# Altium PCB PCB1.PcbDoc
Units mil, origin at the board's own origin, x right, y up, seen from the top; angles counter-clockwise.
Board outline 5000 x 2700 mil, 2 copper layers (Top Layer, Bottom Layer); 49 components, 33 nets, 146 pads, 0 vias.
Unrouted connection lines stored in the file: 91.
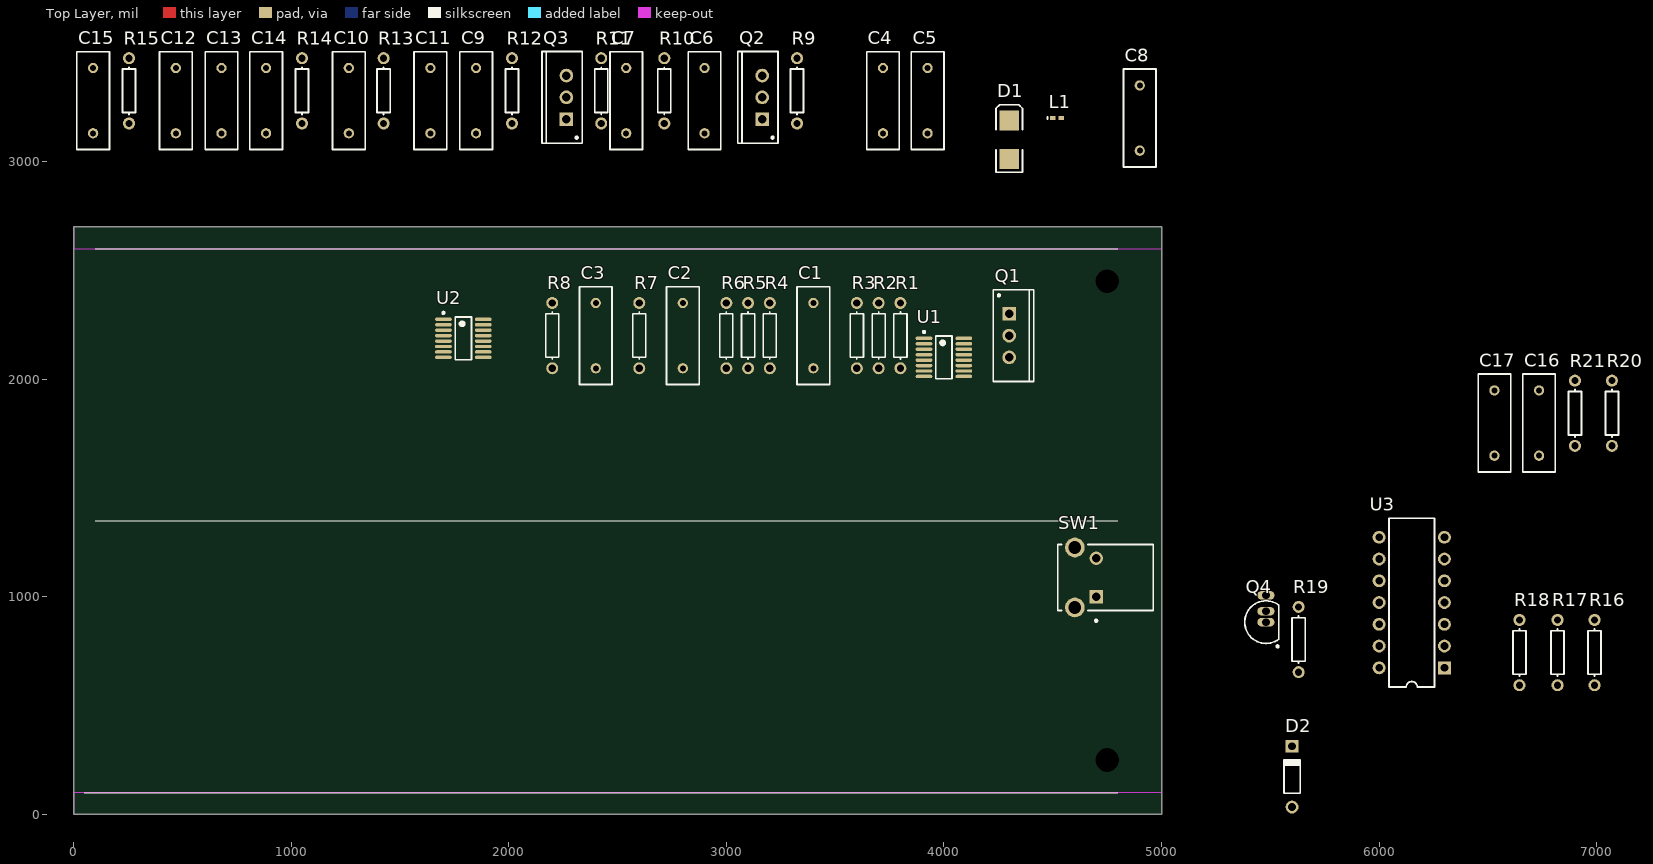
[diagram p0: Top Layer view]
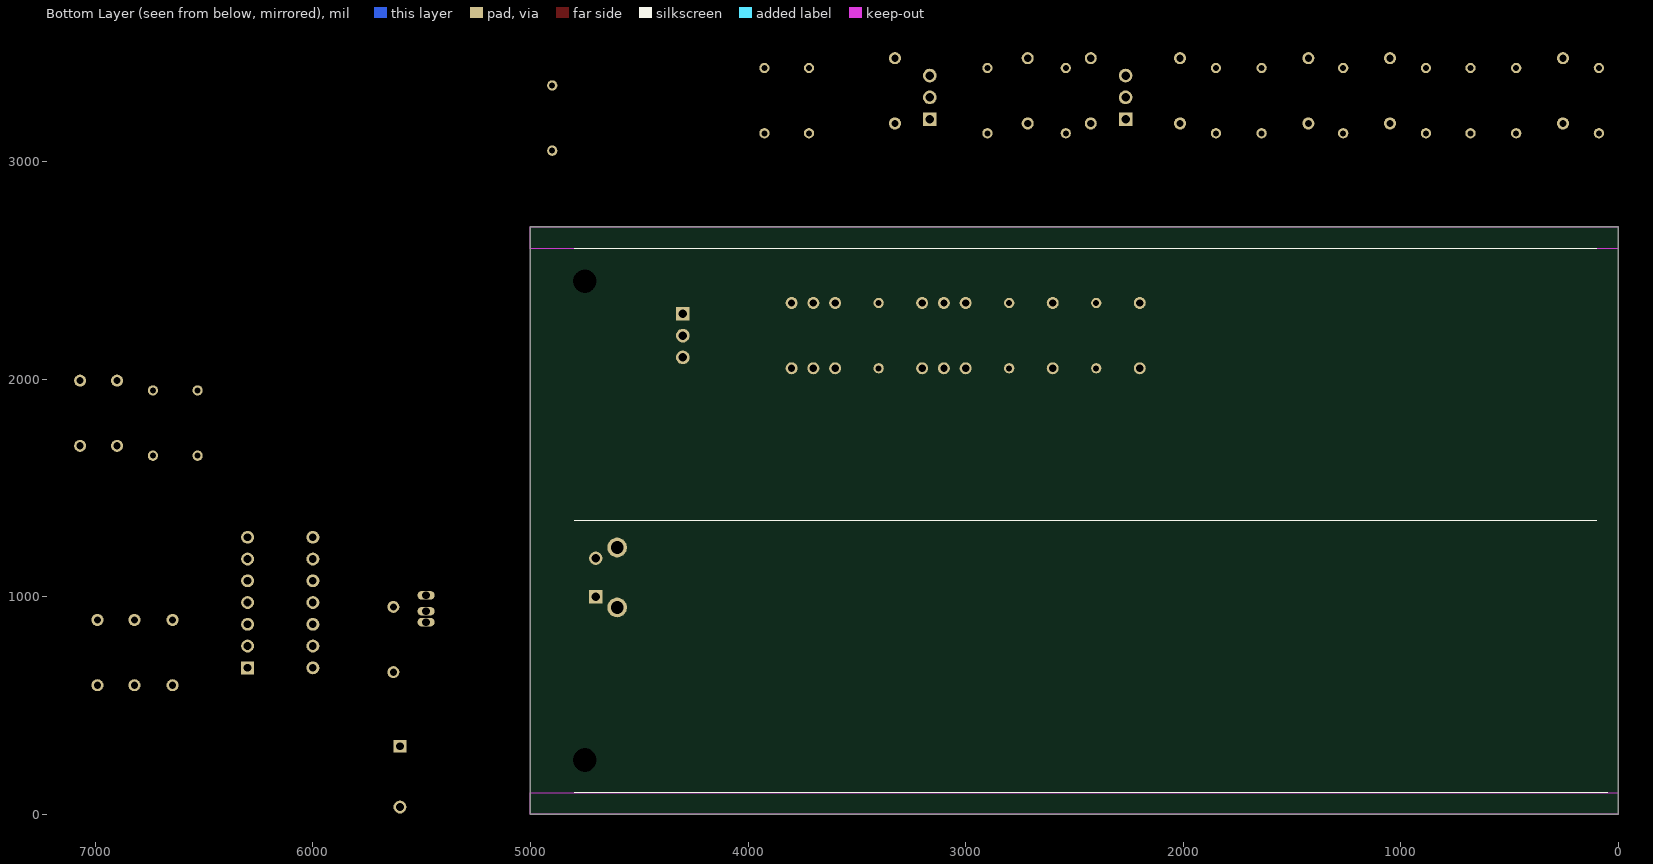
[diagram p1: Bottom Layer view, seen from below]

## Layer stack, top to bottom
Top Solder: solder mask 0.4, Solder Resist, Dk 3.5
Top Layer: signal copper 1.4
Dielectric 1: dielectric 12.6, FR-4, Dk 4.8
Bottom Layer: signal copper 1.4
Bottom Solder: solder mask 0.4, Solder Resist, Dk 3.5

## Board outline
0,0 0,2700 5000,2700 5000,0

## Design rules (kind name [scope] priority, off if disabled: settings)
Clearance [All] p1: gap=10 ignorepadtopadclearanceinfootprint=FALSE except(0: Arc-Hole Track-Hole SMDPad-Hole THPad-Hole Via-Hole Fill-Hole Poly-Hole Region-Hole Text-Hole)
PolygonConnect [All] p1: connectstyle=Relief reliefconductorwidth=10 reliefentries=4 polygonreliefangle="90 Angle" airgapwidth=10
RoutingVias [All] p1: holewidth=28 width=50 viastyle="Through Hole" minholewidth=28 minwidth=50 maxholewidth=28 maxwidth=50
SolderMaskExpansion [All] p1: expansion=4 istentingtop=FALSE
Width [All] p1: maxlimit=10 minlimit=10 preferedwidth=10
30 further rules are at their usual default settings.

## Classes and differential pairs
component class Sheet3: C16 C17 D2 Q4 R16 R17 R18 R19 R20 R21 SW1 U3
component class Sheet2: C4 C5 C6 C7 C8 C9 C10 C11 C12 C13 C14 C15 D1 L1 Q2 Q3 R9 R10 R11 R12 R13 R14 R15 U2
component class Sheet1: C1 C2 C3 Q1 R1 R2 R3 R4 R5 R6 R7 R8 U1

## Components (designator, comment, footprint, x,y, rotation, side; value= is the part's Value field where it differs from the comment)
C1 "Cap" RAD-0.3 3400,2200 r90 top value=?
C2 "Cap" RAD-0.3 2800,2200 r90 top value=?
C3 "Cap" RAD-0.3 2400,2200 r90 top value=?
C4 "Cap" RAD-0.3 3720,3280 r90 top value=?
C5 "Cap" RAD-0.3 3925,3280 r90 top value=?
C6 "Cap" RAD-0.3 2900,3280 r90 top value=?
C7 "Cap" RAD-0.3 2540,3280 r90 top value=?
C8 "Cap" RAD-0.3 4900,3200 r90 top value=?
C9 "Cap" RAD-0.3 1850,3280 r90 top value=?
C10 "Cap" RAD-0.3 1265,3280 r90 top value=?
C11 "Cap" RAD-0.3 1640,3280 r90 top value=?
C12 "Cap" RAD-0.3 470,3280 r90 top value=?
C13 "Cap" RAD-0.3 680,3280 r90 top value=?
C14 "Cap" RAD-0.3 885,3280 r90 top value=?
C15 "Cap" RAD-0.3 90,3280 r90 top value=?
C16 "Cap" RAD-0.3 6735,1798.29 r90 top value=1uF
C17 "Cap" RAD-0.3 6530,1798.29 r90 top value=10uF
D1 "D Schottky" SMB 4300,3100 r90 top
D2 "Diode 1N4148" DO-35 5600,173.29 r90 top
L1 "Inductor" 0402-A 4519.69,3200 r0 top value=3.3uH
Q1 "NMOS-2" TO-220AB 4300,2200 r270 top
Q2 "NMOS-2" TO-220AB 3165,3295 r90 top
Q3 "NMOS-2" TO-220AB 2265,3295 r90 top
Q4 "2N3904" TO-92A 5480,883.29 r0 top
R1 "Res1" AXIAL-0.3 3800,2200 r90 top value=0.010m
R2 "Res1" AXIAL-0.3 3700,2200 r90 top value=10
R3 "Res1" AXIAL-0.3 3600,2200 r90 top value=?
R4 "Res1" AXIAL-0.3 3200,2200 r270 top value=?
R5 "Res1" AXIAL-0.3 3100,2200 r90 top value=?
R6 "Res1" AXIAL-0.3 3000,2200 r90 top value=?
R7 "Res1" AXIAL-0.3 2600,2200 r90 top value=?
R8 "Res1" AXIAL-0.3 2200,2200 r90 top value=?
R9 "Res1" AXIAL-0.3 3325,3325 r90 top value=10
R10 "Res1" AXIAL-0.3 2715,3325 r90 top value=7.5m
R11 "Res1" AXIAL-0.3 2425,3325 r90 top value=10
R12 "Res1" AXIAL-0.3 2015,3325 r90 top value=?
R13 "Res1" AXIAL-0.3 1425,3325 r90 top value=?
R14 "Res1" AXIAL-0.3 1050,3325 r90 top value=?
R15 "Res1" AXIAL-0.3 255,3325 r90 top value=?
R16 "Res1" AXIAL-0.3 6990,743.29 r90 top value=330
R17 "Res1" AXIAL-0.3 6820,743.29 r90 top value=10
R18 "Res1" AXIAL-0.3 6645,743.29 r90 top value=100k
R19 "Res1" AXIAL-0.3 5630,803.29 r90 top value=1k
R20 "Res1" AXIAL-0.3 7070,1843.29 r90 top value=10
R21 "Res1" AXIAL-0.3 6900,1843.29 r90 top value=10k
SW1 "B3F-3152" FP-B3F-3152-MFG 4742.32,1088.58 r90 top
U1 "LT4256-3IGN#PBF" LT-GN-16_L 4000,2100 r0 top
U2 "LTC3851AEGN#PBF" LT-GN-16_L 1791.54,2187.5 r0 top
U3 "SN74LS14N" N014 6150,973.29 r90 top

## Footprints (in the part's own frame and the unit in brackets; to place one, negate y for a bottom-side part, rotate by r counter-clockwise, add the part's x,y. Pads: shape width x height; smd on the part's side, far side on the other; paste and mask are expansions set on the pad)
0402-A [mm] "Chip Inductor, Body 1.0x0.5mm, IPC High Density"
  rect 0.6x0.5 smd: 1(-0.5,0) 2(0.5,0)
  silkscreen extent -1.1,-0.15 -1.1,0.15, body extent -0.55,-0.3 0.55,0.3, height 0.55
AXIAL-0.3 [mm] "Axial Device, Thru-Hole; 2 Leads; 0.3 in Pin Spacing"
  round 1.4 hole 0.85: 1(-3.81,0) 2(3.81,0)
  silkscreen extent -2.77,-0.76 2.77,0.76
DO-35 [mm] "Diode, Axial; Body 3.8 x 1.9 mm (LxDia. max), Lead Dia. 0.53 mm (max)"
  round 1.5 hole 0.9: 1(-3.55,0)
  rect 1.5x1.5 hole 0.9: 2(3.55,0)
  silkscreen extent -1.95,-0.95 2.05,0.95
FP-B3F-3152-MFG [mm]
  rect 1.55x1.55 hole 1 paste-1000 mask+0: 1(-2.25,1.075)
  round 1.55 hole 1 paste-1000 mask+0: 2(2.25,1.075)
  round 2.3 hole 1.5 paste-1000 mask+0: 3(-3.5,3.575) 4(3.5,3.575)
  silkscreen extent -5.17,-5.58 3.85,5.58, body extent -4.75,-5.68 4.75,5.68, height 0.25
LT-GN-16_L [mm] "SOP, 16-Leads, Body 5x4mm, Pitch 0.635mm, IPC High Density"
  oval 1.95x0.4 smd: 1(-2.325,2.222) 2(-2.325,1.587) 3(-2.325,0.953) 4(-2.325,0.318) 5(-2.325,-0.318) 6(-2.325,-0.953) 7(-2.325,-1.587) 8(-2.325,-2.222) 9(2.325,-2.222) 10(2.325,-1.587) 11(2.325,-0.953) 12(2.325,-0.318) 13(2.325,0.318) 14(2.325,0.953) 15(2.325,1.587) 16(2.325,2.222)
  silkscreen extent -2.45,-2.5 0.95,3.1, body extent -2,-2.5 2,2.5, height 1.75
N014 [mm] "DIP; 14 Leads; Row Spacing 7.62 mm; Pitch 2.54 mm"
  rect 1.5x1.5 hole 0.9: 1(-7.62,-3.81)
  round 1.5 hole 0.9: 2(-5.08,-3.81) 3(-2.54,-3.81) 4(0,-3.81) 5(2.54,-3.81) 6(5.08,-3.81) 7(7.62,-3.81) 8(7.62,3.81) 9(5.08,3.81) 10(2.54,3.81) 11(0,3.81) 12(-2.54,3.81) 13(-5.08,3.81) 14(-7.62,3.81)
  silkscreen extent -9.85,-2.65 9.85,2.65, body extent -9.15,-5.08 9.15,5.12, height 7.88
RAD-0.3 [mm] "Radial Cap, Thru-Hole; 2 Leads; 0.3 in Pin Spacing"
  round 1.2 hole 0.7: 1(-3.81,0) 2(3.81,0)
  silkscreen extent -5.71,-1.91 5.71,1.91
SMB [mm] "DO-214-AA/SMB; 2 C-Bend Leads; Body 5.3 x 3.6 mm, inc. leads (LxW)"
  rect 2.3x2.3 smd: 1(-2.25,0) 2(2.25,0)
  silkscreen extent -3.8,-1.55 4.1,1.55
TO-92A [mm] "TO, Flat Index; 3 In-Line, Axial Leads; Body Dia. 4.5mm; Leads 0.51 x 0.48 mm (max)"
  oval 2x1 hole 0.9: 1(0,3.132) 2(0,0) 3(0,1.27)
  silkscreen extent -2.48,-2.95 1.5,2.48, body extent -2.48,-2.5 1.5,2.5, height 6.86
TO-220AB [mm] "TO, Thru-Hole, Vertical, Heatsink Mounted; 3 In-Line Leads; Pitch 2.54 mm"
  rect 1.6x1.6 hole 1: 1(-2.54,0)
  round 1.6 hole 1: 2(0,0) 3(2.54,0)
  silkscreen extent -5.35,-1.85 5.35,2.85, body extent -5.4,-1.9 5.4,2.9, height 19.3

## Part data
C1 C2 C3 C4 C5 C6 C7 C8 C9 C10 C11 C12 C13 C14 C15 C16 C17: "Capacitor", LatestRevisionDate=17-Jul-2002, LatestRevisionNote="Re-released for DXP Platform.", PackageDescription="Radial Cap, Thru-Hole; 2 Leads; 0.3 in Pin Spacing", PackageReference=RAD-0.3, Published=8-Jun-2000, Publisher="Altium Limited"
D1: "Schottky Diode", Code_JEDEC=DO-214-AA, LatestRevisionDate=17-Jul-2002, LatestRevisionNote="Re-released for DXP Platform.", PackageDescription="DO-214-AA/SMB; 2 C-Bend Leads; Body 5.3 x 3.6 mm, inc. leads (LxW)", PackageReference=SMB, Published=8-Jun-2000, Publisher="Altium Limited"
D2: "High Conductance Fast Diode", Code_JEDEC=DO-204-AH, ComponentLink1Description="Manufacturer Link", ComponentLink1URL=http://www.fairchildsemi.com/, ComponentLink2Description=Datasheet, ComponentLink2URL=http://www.fairchildsemi.com/ds/1N%2F1N4148.pdf, DatasheetVersion=1997, LatestRevisionDate=17-Jul-2002, LatestRevisionNote="Re-released for DXP Platform.", PackageDescription="Diode, Axial; Body 3.8 x 1.9 mm (LxDia. max), Lead Dia. 0.53 mm (max)", PackageReference=DO-35, Published=8-Jun-2000, Publisher="Altium Limited"
Q1 Q2 Q3: "N-Channel Power MOSFET", ComponentLink1Description="Manufacturer Link", ComponentLink1URL=http://www.irf.com/, DatasheetVersion=PD-9.814, LatestRevisionDate=17-Jul-2002, LatestRevisionNote="Re-released for DXP Platform.", Note="Pin 2 is electrically connected to pin 4.", PackageDescription="TO, Thru-Hole, Vertical, Heatsink Mounted; 3 In-Line Leads; Pitch 2.54 mm", PackageReference=TO-220AB, PackageVersion=Feb-1997, Published=8-Jun-2000, Publisher="Altium Limited"
Q4: "NPN General Purpose Amplifier", ComponentLink1Description="Manufacturer Link", ComponentLink1URL=http://www.fairchildsemi.com/, ComponentLink2Description=Datasheet, ComponentLink2URL=http://www.fairchildsemi.com/ds/2N%2F2N3904.pdf, DatasheetVersion=1997, LatestRevisionDate=15-Jan-2003, LatestRevisionNote="PCB Footprint 'BCY-W3/D4.7' replaced", PackageDescription="TO, Flat Index; 3 In-Line, Axial Leads; Body Dia. 4.5mm; Leads 0.51 x 0.48 mm (max)", PackageReference=TO-92A, PackageVersion=Sep-1998, Published=8-Jun-2000, Publisher="Altium Limited"
R1 R2 R3 R4 R5 R6 R7 R8 R9 R10 R11 R12 R13 R14 R15 R16 R17 R18 R19 R20 R21: "Resistor", LatestRevisionDate=17-Jul-2002, LatestRevisionNote="Re-released for DXP Platform.", PackageDescription="Axial Device, Thru-Hole; 2 Leads; 0.3 in Pin Spacing", PackageReference=AXIAL-0.3, Published=8-Jun-2000, Publisher="Altium Limited"
SW1: library part CMP-08834-000033-1, "SWITCH TACTILE SPST-NO 0.05A 24V", Actuator Color=Yellow, Contact Current Rating=50mA, Contact Resistance=100mR, Max Operating Temperature=70°C, Max Voltage Rating (DC)=24V, Min Operating Temperature=-25°C, Operating Force=1.47N, Package Quantity=1000, Ratings=IP00, Actuator Type=PLUNGER, Contact Material=Gold, Contact Plating=Gold, Contact Type="1 maker", Current Rating=50mA, Depth=7.15mm, Electrical Life=300000Cycles, Height=6.15mm, Illumination Type=Non-Illuminated, Lead Free="Lead Free", Length=7.3mm, Max Current Rating=50mA, Mechanical Life=300000Cycles, Mount="Through Hole", Number of Pins=4, Number of Poles=1, Orientation="Right Angle", Packaging=Bulk, Radiation Hardening=No, RoHS Compliant=Yes, Series=B3F, Switch Function=Off-Mom, Switch Travel=0.25mm, Termination="PC Pins", Throw Configuration=SPST, Voltage Rating (DC)=24V, Weight=0.25g, Width=6mm
U1: library part CMP-0474-00283-1, "Positive High Voltage Hot Swap Controller with Open-Circuit Detect, 10.8 to 80 V Vin, 16-pin SOP (GN-16), -40 to 85 degC, Pb-Free", Extended Temp="C, I", In-Rush Current=Active, Manufacturer="Linear Technology", Power Good=yes, Active Limiting=yes, Circuit Breaker Accuracy(%)=18, Circuit Breaker Threshold="55 mV", Circuit Breakers(#)=1, ComponentLink1Description="Manufacturer URL", ComponentLink1URL=http://www.linear.com/, ComponentLink2Description=Datasheet, ComponentLink2URL=http://cds.linear.com/docs/en/datasheet/42563fa.pm6.pdf, ComponentLink3Description="Package Specification", ComponentLink3URL=http://cds.linear.com/docs/en/packaging/05081641_B_GN16.pdf, DatasheetVersion="Rev. A", Fast Comparator=no, Fault=no, Foldback=yes, Mounting Technology="Surface Mount", PackageDescription="16-Pin Plastic SSOP, Body 4.9 x 3.9 mm, Pitch 0.635 mm", PackageReference=GN-16, PackageVersion="Rev. B, 03/2012", PartNumber=LT4256-3IGN#PBF, Reset=no, RoHS=TRUE, Vin Range="10.8 to 80 V"
U2: library part CMP-0492-01020-1, "Synchronous Step-Down Switching Regulator Controller (with Improved PLL), 16-pin SOP (GN-16), -40 to 125 degC, Pb-Free", Frequency Sync Range="250kHz - 750kHz", Manufacturer="Linear Technology", ComponentLink1Description="Manufacturer URL", ComponentLink1URL=http://www.linear.com/, ComponentLink2Description=Datasheet, ComponentLink2URL=http://cds.linear.com/docs/en/datasheet/3851afa.pdf, ComponentLink3Description="Package Specification", ComponentLink3URL=http://cds.linear.com/docs/en/packaging/05081641_B_GN16.pdf, DatasheetVersion="Rev. A", Mounting Technology="Surface Mount", Number of Outputs=1, PackageDescription="16-Pin Plastic SSOP, Body 4.9 x 3.9 mm, Pitch 0.635 mm", PackageReference=GN-16, PackageVersion="Rev. B, 03/2012", PartNumber=LTC3851AEGN#PBF, RoHS=TRUE
U3: "Hex Schmitt-Trigger Inverter", ComponentLink1Description="Manufacturer Link", ComponentLink1URL=http://www.ti.com/, ComponentLink2Description=Datasheet, ComponentLink2URL=http://www-s.ti.com/sc/ds/sn74ls14.pdf, DatasheetVersion=Mar-1988, LatestRevisionDate=04-Mar-2005, LatestRevisionNote="Stylized 3D Model Added.", PackageDescription="DIP; 14 Leads; Row Spacing 7.62 mm; Pitch 2.54 mm", PackageReference=N014, PackageVersion=Oct-1995, Published=8-Jun-2000, Publisher="Altium Limited"
L1: Code_IEC=1005, Code_JEITA=0402, LatestRevisionDate=29-May-2009, LatestRevisionNote="IPC-7351 Footprint Added.", PackageDescription="Chip Inductor", PackageReference=0402-A, Published=8-Jun-2000, Publisher="Altium Limited"

## Free pads (board coordinates)
  round 0 hole 109: ""(4750,250) ""(4750,2450)

## Nets (pads, with @x,y where several pads share a name; then routed paths per layer and width w, separated by ;. In a path a pad name is that pad's centre, name@x,y a point inside that pad or via, vN(x,y) a via of type N, cw(c..) or ccw(c..) an arc to the next point about the centre after c; other vN are vias at no path point)
GND: C1.1 C2.1 C3.1 C4.1 C5.1 C7.1 C8.1 C9.1 C10.1 C11.1 C12.1 C13.1 C15.1 C16.1 C17.1 Q3.3 Q4.1 R7.1 R8.1 R13.1 R15.1 R21.2 SW1.1 U1.8 U2.10 U3.7
INTVCC: C12.2 D1.1 U2.12
MR#: R20.2 SW1.2
NetC1_2: C1.2 R4.1
NetC2_2: C2.2 R3.1 R6.2 U1.1
NetC3_2: C3.2 U1.9
NetC4_2: C4.2 C5.2 Q2.2 U2.13
NetC6_1: C6.1 L1.1 Q2.3 Q3.2 U2.16
NetC6_2: C6.2 D1.2 U2.14
NetC9_2: C9.2 R12.2 U2.5
NetC10_2: C10.2 U2.4
NetC11_2: C11.2 R13.2 U2.2
NetC13_2: C13.2 R12.1
NetC14_1: C14.1 C15.2 R14.1 R15.2 U2.6
NetC16_2: C16.2 Q4.2 R19.1 R21.1
NetC17_2: C17.2 D2.1 R18.1 R20.1 U3.1
NetL1_2: L1.2 R10.2 U2.8
NetQ1_1: Q1.1 R2.2
NetQ1_2: Q1.2 R1.2 U1.15
NetQ1_3: Q1.3 R5.2 U1.12
NetQ2_1: Q2.1 R9.1
NetQ3_1: Q3.1 R11.1
NetQ4_3: Q4.3 R16.2 R17.2
NetR1_1: R1.1 R3.2 U1.16
NetR2_1: R2.1 R4.2 U1.13
NetR5_1: R5.1 R7.2 U1.10
NetR6_1: R6.1 R8.2 U1.2
NetR9_2: R9.2 U2.15
NetR11_2: R11.2 U2.11
NetR19_2: R19.2 U3.4
NetU3_2: U3.2 U3.3
RST: R17.1
VCC: C7.2 C8.2 C14.2 D2.2 R10.1 R14.2 R16.1 R18.2 U2.7 U3.14
pads on no net: SW1.3 SW1.4 U1.3 U1.4 U1.5 U1.6 U1.7 U1.11 U1.14 U2.1 U2.3 U2.9 U3.5 U3.6 U3.8 U3.9 U3.10 U3.11 U3.12 U3.13

## Keep-outs
Top Layer:
  rectangle: 0,0 5000,100
  rectangle: 0,2600 5000,2700
Bottom Layer:
  rectangle: 0,2600 5000,2700
  rectangle: 0,0 5000,100

## Silkscreen, mask and mechanical layers (free items; w line width, h text height)
Top Overlay:
  lines w5: 50,100 4800,100 ; 100,1350 4800,1350 ; 100,2600 4800,2600
Bottom Overlay:
  lines w5: 50,100 4800,100 ; 100,1350 4800,1350 ; 100,2600 4800,2600